# Altium PCB WIZ750SR_V1.0.PcbDoc
Units mm, origin at the board's own origin, x right, y up, seen from the top; angles counter-clockwise.
Board outline 45 x 30 mm, 4 copper layers (Top Layer, Internal Plane 1, Internal Plane 2, Bottom Layer); 94 components, 70 nets, 325 pads, 127 vias.
Unrouted connection lines stored in the file: 1.
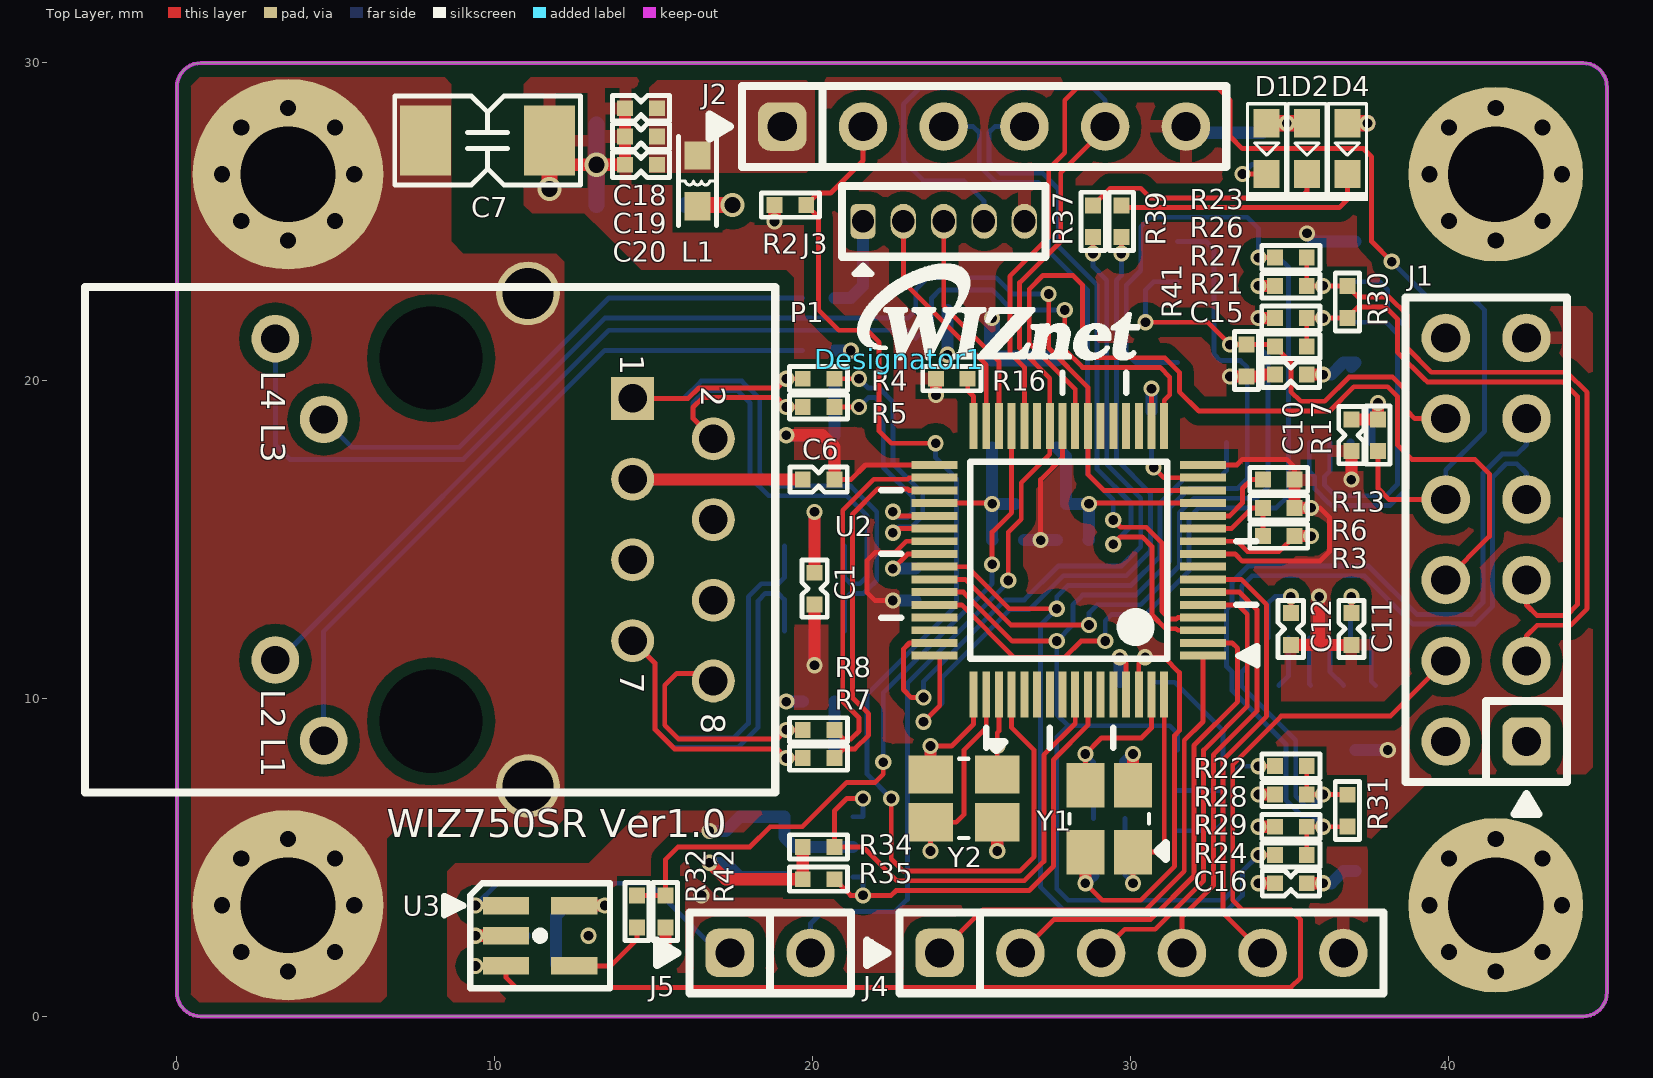
[diagram p0: Top Layer view]
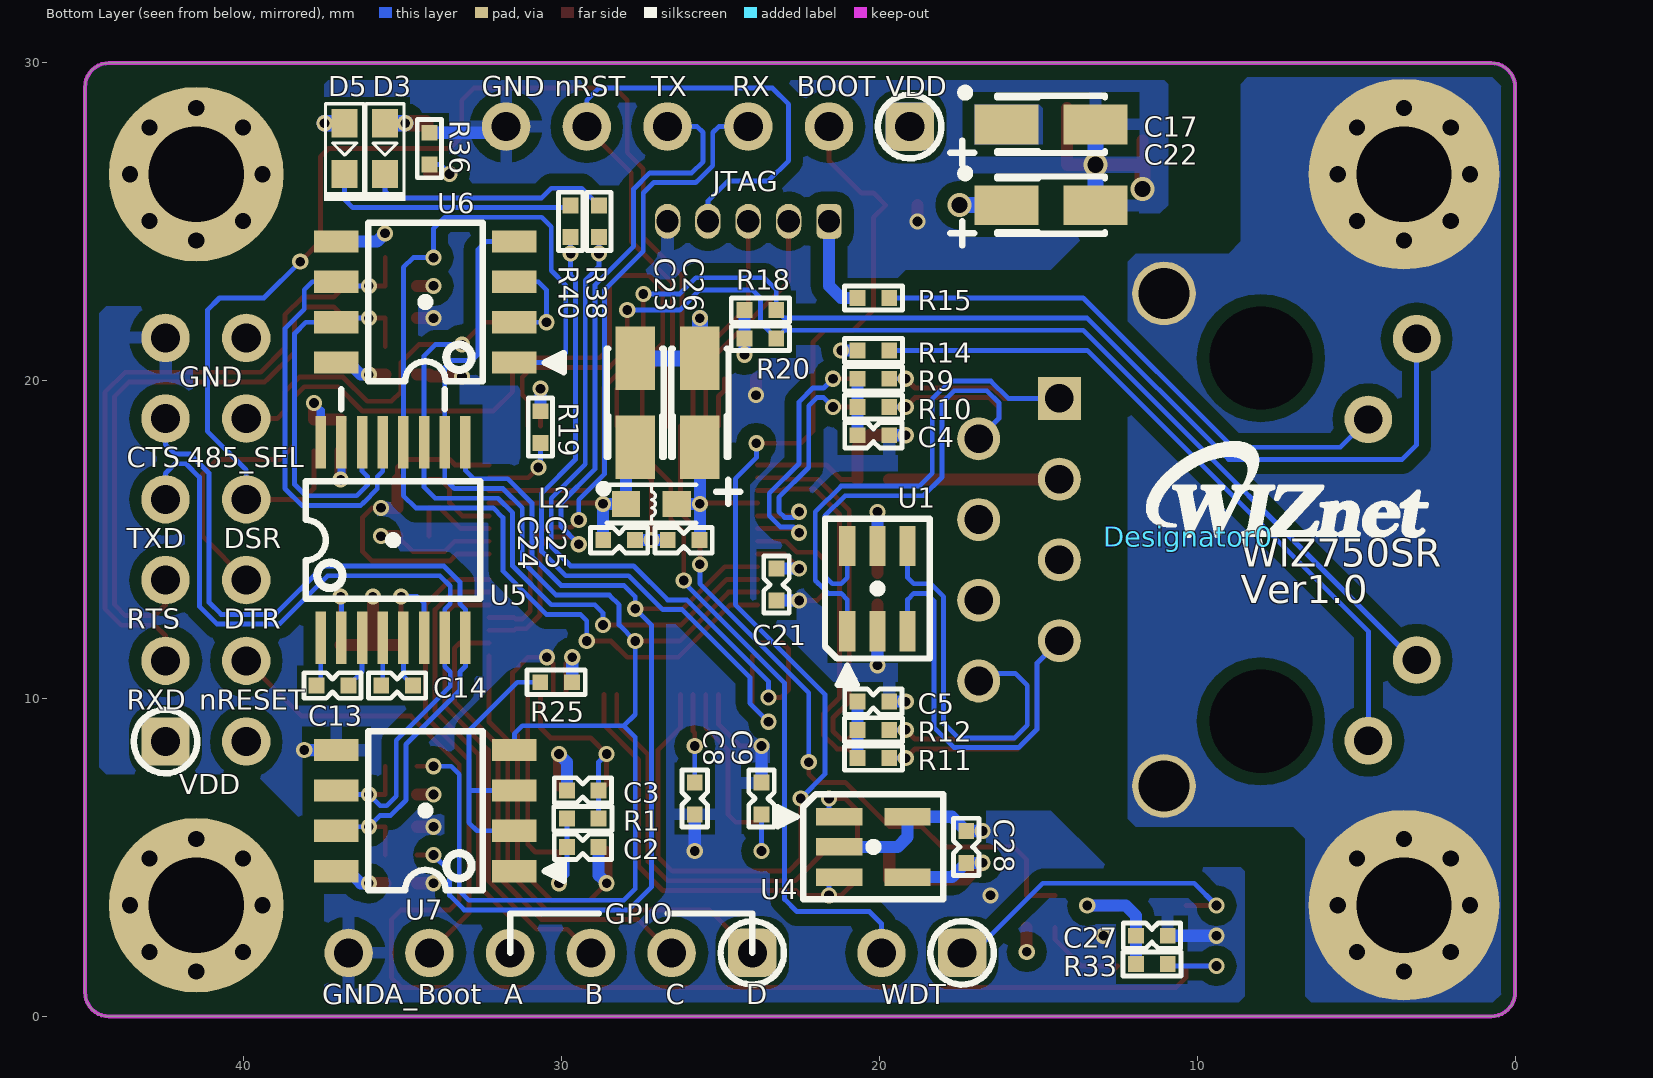
[diagram p1: Bottom Layer view, seen from below]
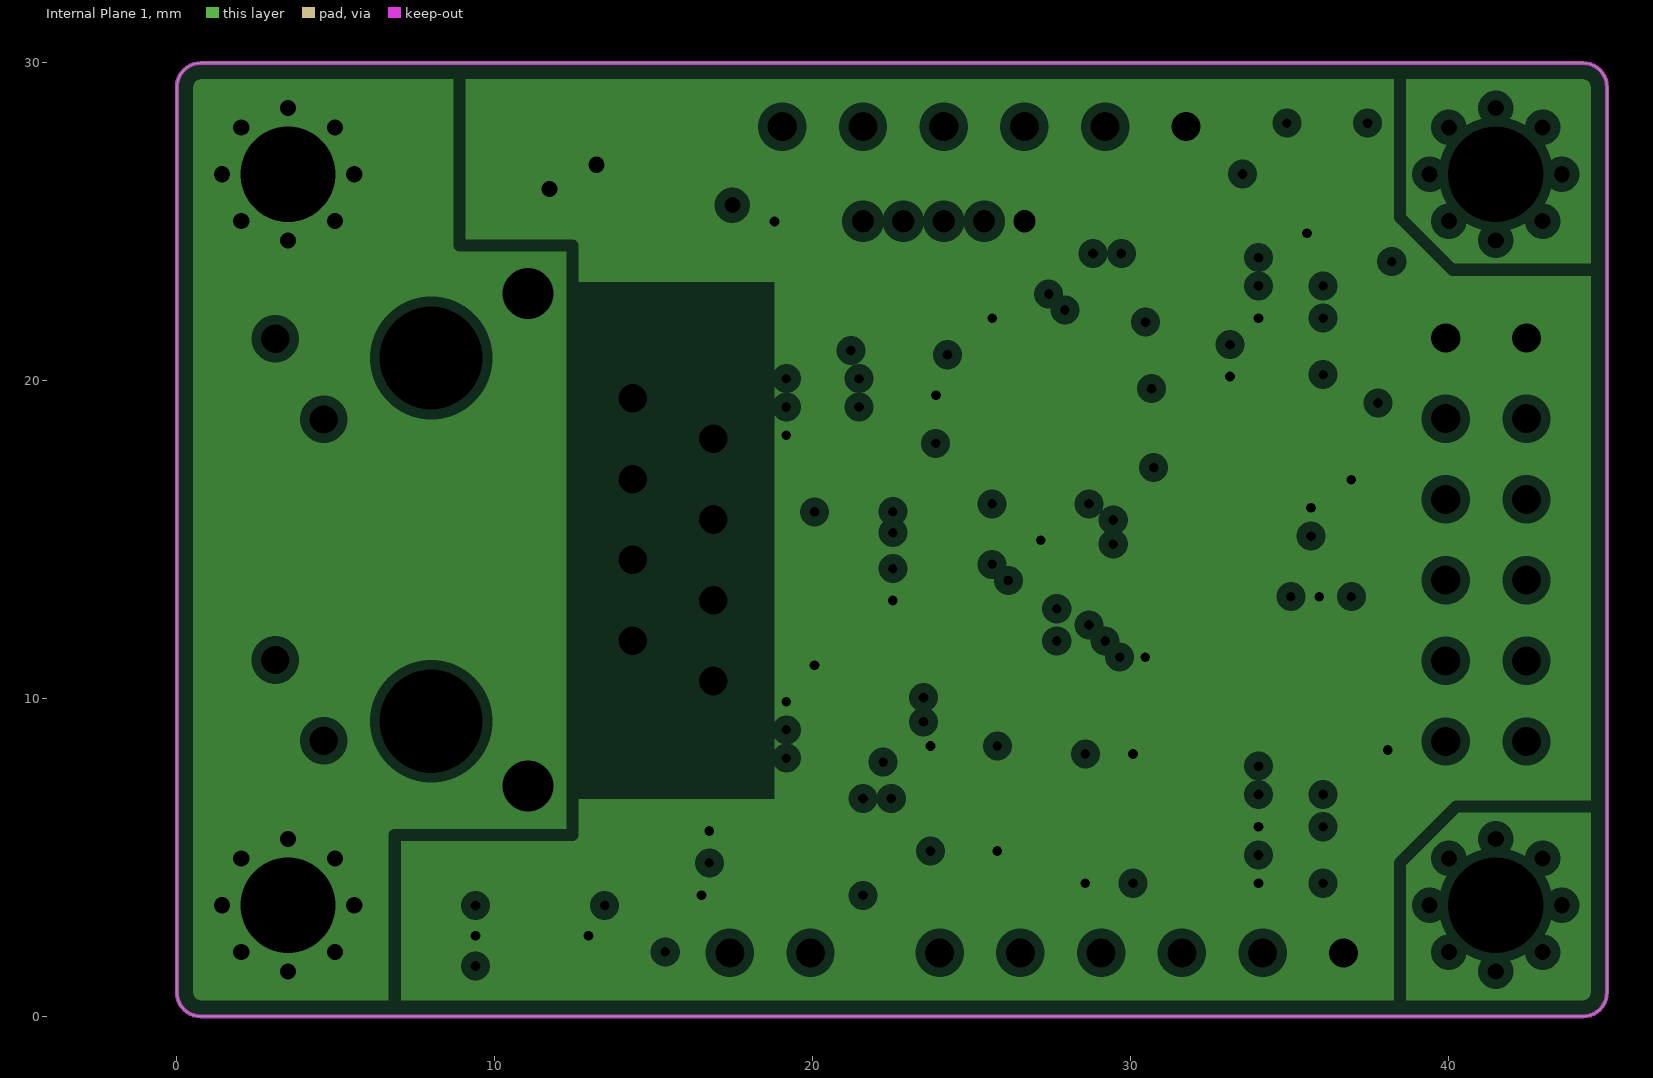
[diagram p2: Internal Plane 1, clearances drawn from the general rule]
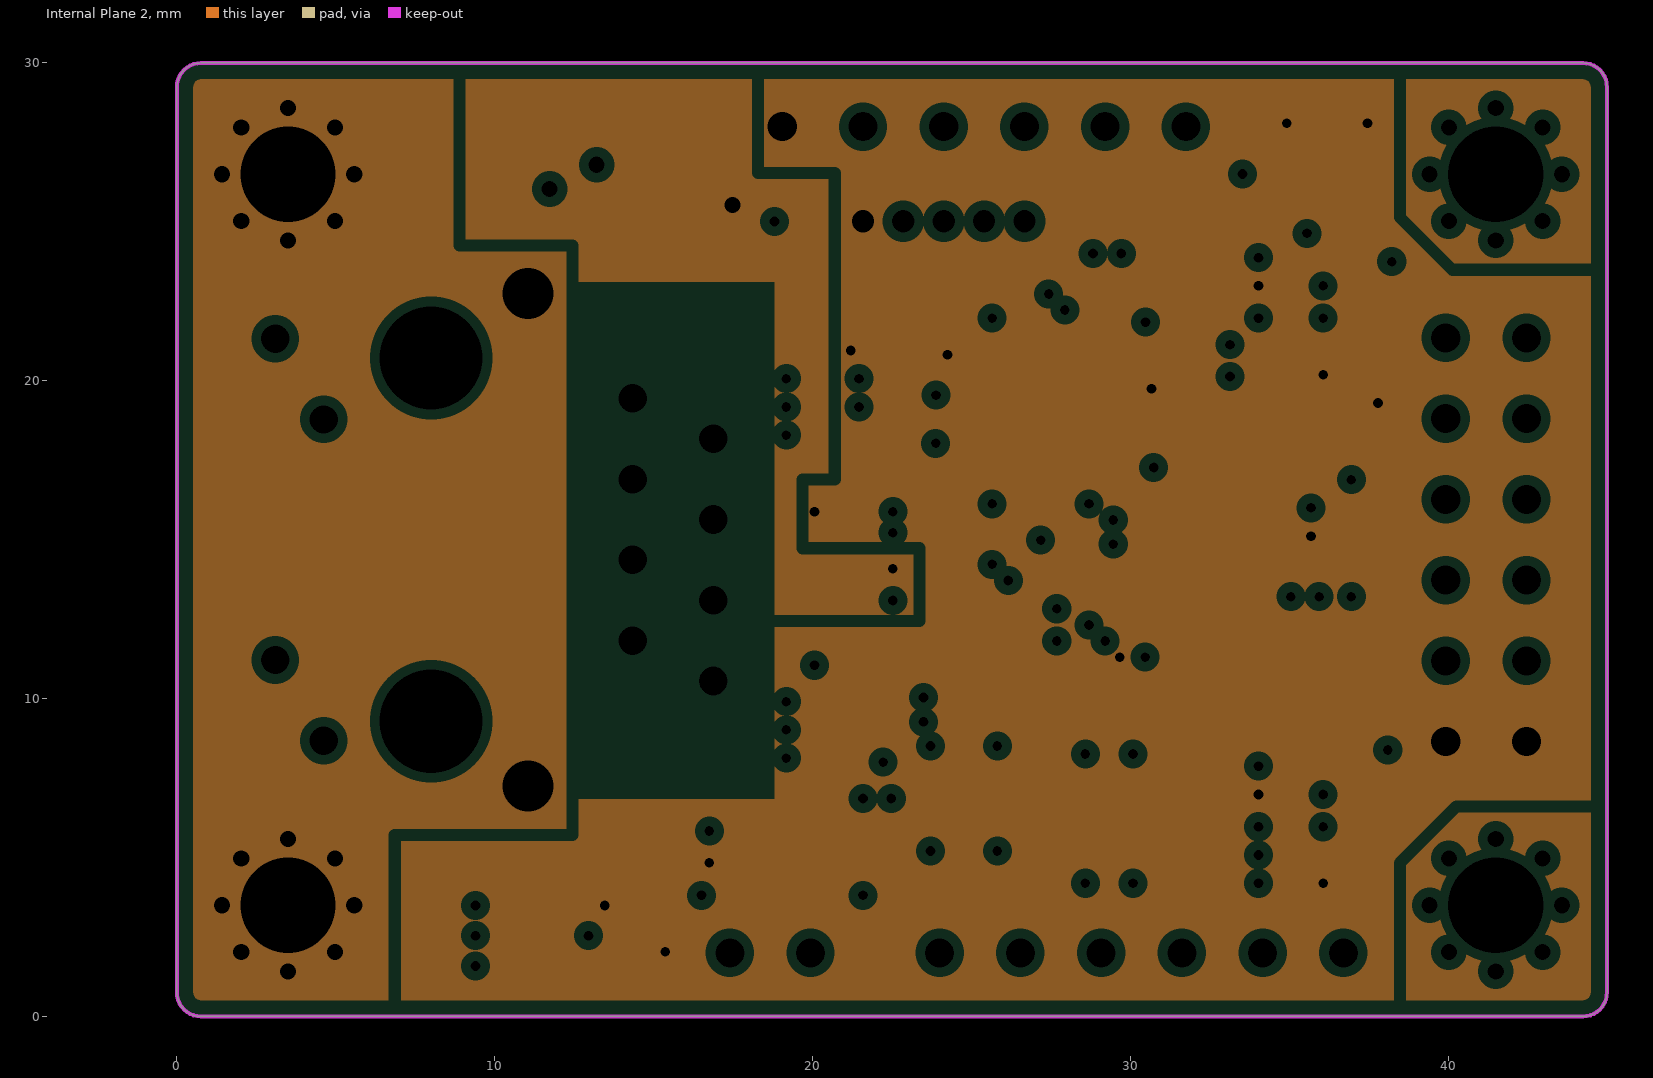
[diagram p3: Internal Plane 2, clearances drawn from the general rule]
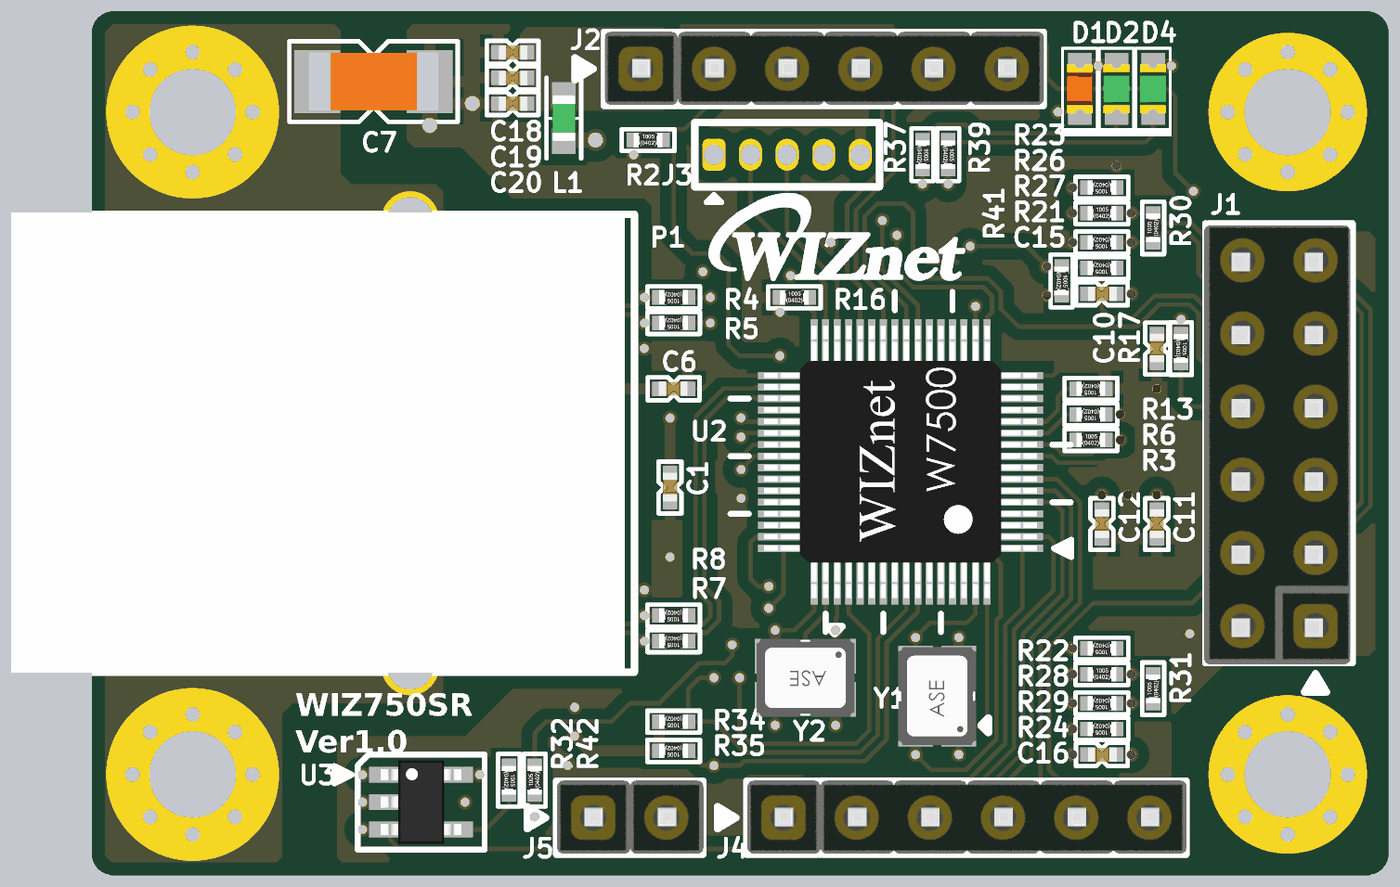
[diagram p4: 3D render of the assembled board from above, using the file's embedded part models]
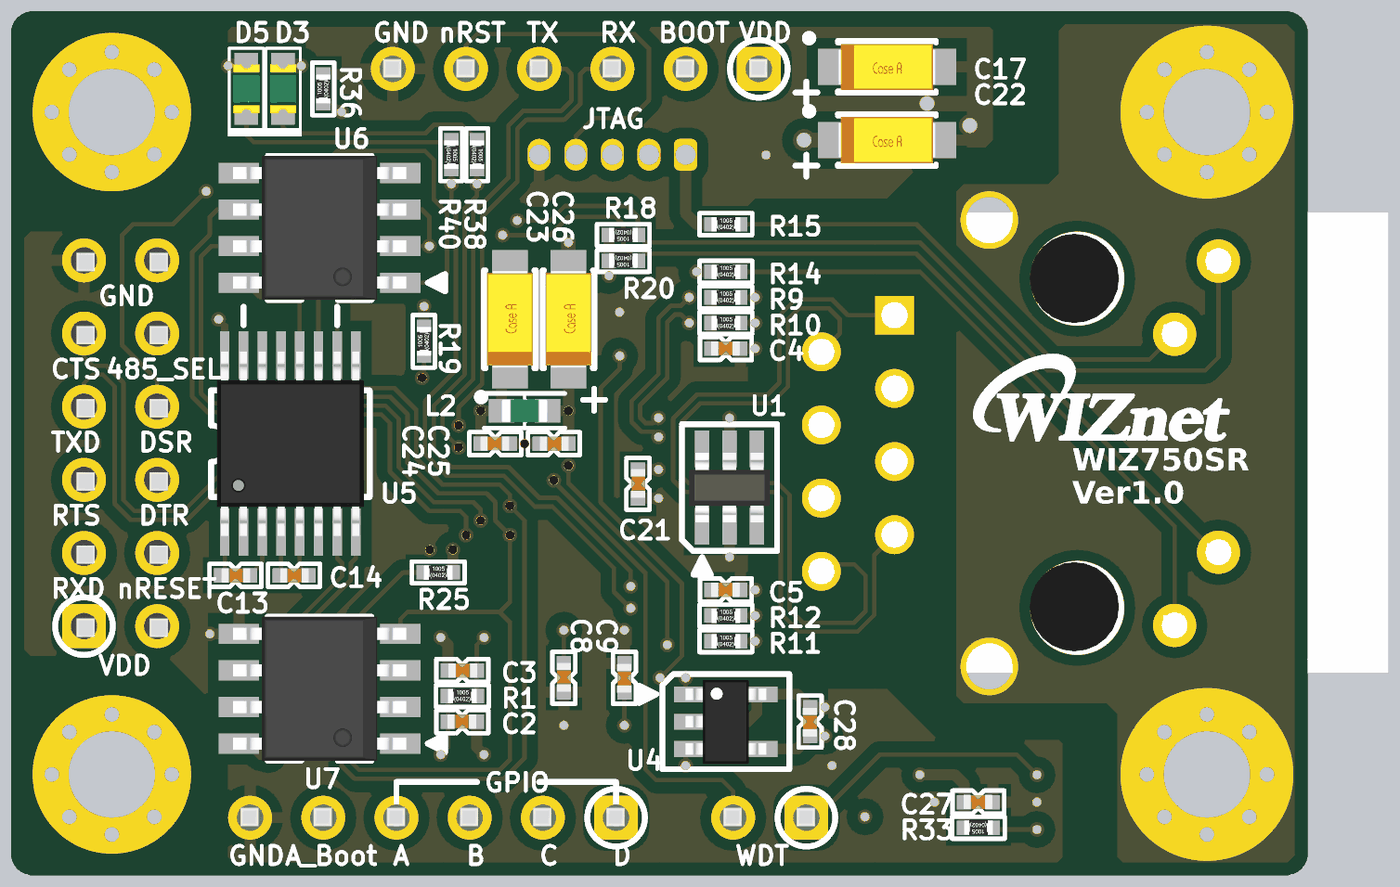
[diagram p5: 3D render of the assembled board from below, using the file's embedded part models]

## Layer stack, top to bottom
Top Solder: solder mask 0.0102, Solder Resist, Dk 3.5
Top Layer: signal copper 0.0356
Dielectric1: core 0.32, FR-4, Dk 4.8
Internal Plane 1: plane copper 0.0356, net CH_GND
Dielectric5: prepreg 0.32, FR-4, Dk 4.8
Internal Plane 2: plane copper 0.0356, net CH_GND
Dielectric6: core 0.32, FR-4, Dk 4.8
Bottom Layer: signal copper 0.0356
Bottom Solder: solder mask 0.0102, Solder Resist, Dk 3.5

## Board outline
0,0.762 0,29.238 cw(c0.762,29.238) 0.762,30 44.238,30 cw(c44.238,29.238) 45,29.238 45,0.762 cw(c44.238,0.762) 44.238,0 0.762,0 cw(c0.762,0.762)

## Design rules (kind name [scope] priority, off if disabled: settings)
Clearance [All] p1: gap=0.15 except(0.381: Poly-Poly Via-Poly Track-Poly SMDPad-Poly Fill-Poly THPad-Poly)
DiffPairsRouting [All] p1: maxlimit=0.254 minlimit=0.127 mostfreqgap=0.152 toplayer_minwidth=0.152 toplayer_maxwidth=0.381 toplayer_prefwidth=0.152 bottomlayer_minwidth=0.152 bottomlayer_maxwidth=0.381 bottomlayer_prefwidth=0.152 maxuncoupledlength=15.24
HoleSize [All] p1: absolutevalues=TRUE maxlimit=4.064 minlimit=0.025 maxpercent=80.000 minpercent=20.000
PlaneClearance [All] p1: clearance=0.305
PlaneConnect [All] p1: planeconnectstyle=Direct reliefexpansion=0.508 reliefentries=4 reliefconductorwidth=0.254 reliefairgap=0.254
PolygonConnect PolygonConnect_2 [IsPad vs IsNamedPolygon('Top Layer-GND') Or  IsNamedPolygon('Bottom Layer-GND')] p1: connectstyle=Relief reliefconductorwidth=0.381 reliefentries=4 polygonreliefangle="90 Angle" airgapwidth=0.381
PolygonConnect PolygonConnect_1 [IsVia] p2: connectstyle=Direct reliefconductorwidth=0.254 reliefentries=4 polygonreliefangle="90 Angle" airgapwidth=0.254
PolygonConnect [All] p3: connectstyle=Direct reliefconductorwidth=0.254 reliefentries=4 polygonreliefangle="90 Angle" airgapwidth=0.254
RoutingVias [All] p1: holewidth=0.305 width=0.508 viastyle="Through Hole" minholewidth=0.305 minwidth=0.508 maxholewidth=0.508 maxwidth=0.762
SolderMaskExpansion [All] p1: expansion=0
UnpouredPolygon [All] p1: allowunpoured=FALSE
Width [All] p1: maxlimit=2.54 minlimit=0.102 preferedwidth=0.152 minimp=50.000000 maximp=50.000000 favimp=50.000000
25 further rules are at their usual default settings.

## Classes and differential pairs
component class 1.WIZ750SR_W7500P: C1 C2 C3 C4 C5 C6 C7 C8 C9 P1 R1 R2 R3 R4 R5 R6 R7 R8 R9 R10 R11 R12 R13 R14 R15 R16 R17 R18 R19 R20 U1 U2 Y1 Y2
component class 2.WIZ750SR_Transceiver: C10 C11 C12 C13 C14 C15 C16 J1 LD1 LD2 R21 R22 R23 R24 R25 R26 R27 R28 R29 R30 R31 R41 U5 U6 U7
differential pair U_DIFF: +U_RXD2 -U_TXD2
differential pair MDI_T: +MDI_T_P -MDI_T_N
differential pair MDI_R: +MDI_R_P -MDI_R_N
differential pair MDI0_T: +MDI0_T_P -MDI0_T_N
differential pair MDI0_R: +MDI0_R_P -MDI0_R_N
differential pair 422_RXD: +422_RXD+ -422_RXD-
differential pair 422_TXD: +422_TXD+ -422_TXD-

## Components (designator, comment, footprint, x,y, rotation, side; value= is the part's Value field where it differs from the comment)
C1 "0.1uF" CAP-0402 20.066,13.462 r90 top
C2 "20pF" CAP-0402 29.337,5.334 r0 bottom
C3 "20pF" CAP-0402 29.337,7.112 r180 bottom
C4 "0.1uF" CAP-0402 20.193,18.288 r0 bottom
C5 "0.1uF" CAP-0402 20.193,9.906 r0 bottom
C6 "0.1uF" CAP-0402 20.193,16.891 r180 top
C7 "1nF/2kV" CAP-1808 9.779,27.559 r180 top
C8 "18pF" CAP-0402 25.815,6.858 r90 bottom
C9 "18pF" CAP-0402 23.715,6.858 r270 bottom
C10 "0.1uF" CAP-0402 36.957,18.288 r90 top
C11 "0.1uF" CAP-0402 36.957,12.192 r90 top
C12 "0.1uF" CAP-0402 35.052,12.192 r90 top
C13 "0.1uF" CAP-0402 37.211,10.414 r180 bottom
C14 "0.1uF" CAP-0402 35.179,10.414 r180 bottom
C15 "0.1uF" CAP-0402 35.052,20.193 r0 top
C16 "0.1uF" CAP-0402 35.052,4.191 r0 top
C17 "10uF/16V" "CAP-A Size" 14.605,28.067 r180 bottom
C18 "0.1uF" CAP-0402 14.605,28.575 r0 top
C19 "0.1uF" CAP-0402 14.605,27.686 r0 top
C20 "0.1uF" CAP-0402 14.605,26.797 r0 top
C21 "0.1uF" CAP-0402 23.241,13.589 r90 bottom
C22 "10uF/16V" "CAP-A Size" 14.605,25.527 r180 bottom
C23 "10uF/16V" "CAP-A Size" 27.686,19.304 r90 bottom
C24 "0.1uF" CAP-0402 28.194,14.986 r0 bottom
C25 "0.1uF" CAP-0402 26.162,14.986 r180 bottom
C26 "10uF/16V" "CAP-A Size" 25.654,19.304 r90 bottom
C27 "0.1uF" CAP-0402 11.43,2.54 r0 bottom
C28 "0.1uF" CAP-0402 17.272,5.334 r270 bottom
D1 "RED-0603" LED-0603-RED 34.29,27.305 r270 top
D2 "GREEN-0603" LED-0603-GREEN 35.56,27.305 r270 top
D3 "GREEN-0603" LED-0603-GREEN 35.56,27.305 r270 bottom
D4 "GREEN-0603" LED-0603-GREEN 36.83,27.305 r270 top
D5 "GREEN-0603" LED-0603-GREEN 36.83,27.305 r270 bottom
Designator0 "Comment" LOGO-WIZNET(SMALL) 10.287,15.113 r180 bottom
Designator1 "Comment" LOGO-WIZNET(SMALL) 22.733,20.701 r0 top locked
J1 "2.54mm 6x2 Pin Header DIP" IDC-2X6 42.466,8.65 r90 top locked
J2 "2.54mm 1x6 Pin Header DIP" IDC-1X6 19.05,28 r0 top locked
J3 "1.27mm_1x5_Pin_header_DIP" IDC-1X5(1.27MM) 21.59,25.019 r0 top
J4 "2.54mm 1x6 Pin Header DIP" IDC-1X6 24.003,2 r0 top
J5 "2.54mm Pin Header" IDC-1X2 17.399,2 r0 top locked
L1 "HH-1M1608-121JT" IND-0603 16.383,26.289 r270 top
L2 "HH-1M1608-121JT" IND-0603 27.178,16.129 r180 bottom
P1 "BS-RB10005" RJ45-125BAG1A 8,15 r270 top locked
R1 "1M" RES-0402#1 29.337,6.223 r180 bottom
R2 "4.7K" RES-0402#1 19.304,25.527 r0 top
R3 "4.7K" RES-0402#1 34.671,15.113 r0 top
R4 "33R" RES-0402#1 20.193,20.066 r180 top
R5 "33R" RES-0402#1 20.193,19.177 r180 top
R6 "4.7K" RES-0402#1 34.671,16.002 r180 top
R7 "33R" RES-0402#1 20.193,8.128 r180 top
R8 "33R" RES-0402#1 20.193,9.017 r180 top
R9 "49.9R/1%" RES-0402#1 20.193,20.066 r180 bottom
R10 "49.9R/1%" RES-0402#1 20.193,19.177 r180 bottom
R11 "49.9R/1%" RES-0402#1 20.193,8.128 r180 bottom
R12 "49.9R/1%" RES-0402#1 20.193,9.017 r180 bottom
R13 "4.7K" RES-0402#1 34.671,16.891 r180 top
R14 "330R" RES-0402#1 20.193,20.955 r180 bottom
R15 "330R" RES-0402#1 20.193,22.606 r180 bottom
R16 "6.19K/1%" RES-0402#1 24.384,20.066 r0 top
R17 "4.7K" RES-0402#1 37.795,18.288 r270 top
R18 "5.1K" RES-0402#1 23.749,22.225 r0 bottom
R19 "5.1K" RES-0402#1 30.67,18.542 r90 bottom
R20 "5.1K" RES-0402#1 23.749,21.336 r0 bottom
R21 "0R" RES-0402#1 35.052,21.082 r180 top
R22 "0R" RES-0402#1 35.052,7.874 r180 top
R23 "0R" RES-0402#1 35.052,23.876 r180 top
R24 "0R" RES-0402#1 35.052,5.08 r180 top
R25 "4.7K" RES-0402#1 30.175,10.516 r180 bottom
R26 "200R" RES-0402#1 35.052,22.987 r0 top
R27 "200R" RES-0402#1 35.052,21.971 r180 top
R28 "200R" RES-0402#1 35.052,6.985 r0 top
R29 "200R" RES-0402#1 35.052,5.969 r180 top
R30 "120R" RES-0402#1 36.83,22.479 r90 top
R31 "120R" RES-0402#1 36.83,6.477 r90 top
R32 "0R" RES-0402#1 14.478,3.302 r270 top
R33 "4.7K" RES-0402#1 11.43,1.651 r0 bottom
R34 "4.7K" RES-0402#1 20.193,5.334 r180 top
R35 "4.7K" RES-0402#1 20.193,4.318 r180 top
R36 "330R" RES-0402#1 34.163,27.305 r90 bottom
R37 "330R" RES-0402#1 28.829,25.019 r270 top
R38 "330R" RES-0402#1 28.829,25.019 r270 bottom
R39 "330R" RES-0402#1 29.718,25.019 r270 top
R40 "330R" RES-0402#1 29.718,25.019 r270 bottom
R41 "NC" RES-0402#1 33.655,20.637 r270 top
R42 "4.7K" RES-0402#2 15.367,3.302 r90 top
U1 "tpd4s009" SOT-23-6L 20.066,13.462 r90 bottom
U2 "W7500P" W7500-LQFP64 28.067,14.351 r180 top locked
U3 "STM6823RWY6F" SOT-23-5L 11.43,2.54 r0 top
U4 "24AA16T-I/OT" SOT-23-5L 20.193,5.334 r180 bottom
U5 "SP3232EBEY" TSSOP16(0.65/6.4) 35.306,14.986 r90 bottom locked
U6 "SP3485EN" SO-08 34.29,22.479 r0 bottom
U7 "SP3485EN" SO-08 34.29,6.477 r0 bottom
Y1 "12MHz" OSC-TZ1067B 29.337,6.223 r90 top
Y2 "25MHz" OSC-82J0626 24.765,6.858 r180 top

## Footprints (in the part's own frame and the unit in brackets; to place one, negate y for a bottom-side part, rotate by r counter-clockwise, add the part's x,y. Pads: shape width x height; smd on the part's side, far side on the other; paste and mask are expansions set on the pad)
CAP-0402 [mm]
  rect 0.5x0.5 smd: 1(-0.5,0) 2(0.5,0)
  silkscreen extent -0.9,-0.4 0.9,0.4, body extent -0.48,-0.25 0.52,0.25, height 0.6
CAP-1808 [mm] "Ceramic CAP 1808(4520)"
  rect 1.6x2.2 smd: 1(-1.95,0) 2(1.95,0)
  silkscreen extent -2.92,-1.4 2.92,1.4, body extent -2.25,-1.02 2.25,1.01, height 2
"CAP-A Size" [mm] "Tantal CAP A Size EIA/IECQ 3216"
  rect 2x1.25 smd: 1(-1.4,0) 2(1.4,0)
  silkscreen extent -3.17,-1.27 1.7,1.12, body extent -1.7,-0.8 1.7,0.8, height 1.75
IDC-1X2 [mil]
  rrect50% 60x60 hole 36: 1(0,0)
  round 60 hole 36: 2(100,0)
  silkscreen extent -90,-50 150,50, body extent -49,-49 151,51, height 336
IDC-1X5(1.27MM) [mm]
  rrect50% 0.8x1.1 hole 0.7: 1(0,0)
  oval 0.8x1.1 hole 0.7: 2(1.27,0) 3(2.54,0) 4(3.81,0) 5(5.08,0)
  silkscreen extent -0.66,-1.65 5.74,1.11
IDC-1X6 [mil] "6-Way 2.54 mm Male Header"
  rrect50% 60x60 hole 36: 1(0,0)
  round 60 hole 36: 2(100,0) 3(200,0) 4(300,0) 5(400,0) 6(500,0)
  silkscreen extent -90,-50 550,50, body extent -49,-49 551,51, height 336
IDC-2X6 [mil]
  rrect50% 60x60 hole 36: 1(0,0)
  round 60 hole 36: 2(0,100) 3(100,0) 4(100,100) 5(200,0) 6(200,100) 7(300,0) 8(300,100) 9(400,0) 10(400,100) 11(500,0) 12(500,100)
  silkscreen extent -90,-50 550,150, body extent -52,-48 548,152, height 336
IND-0603 [mm] "Inductor 0603(1608)"
  rect 0.89x0.82 smd: 1(-0.8,0) 2(0.8,0)
  silkscreen extent -1.4,-0.6 1.4,0.6, body extent -0.8,-0.4 0.8,0.4, height 0.95
LED-0603-GREEN [mm] "LED-0603-GREEN"
  rect 0.89x0.82 smd: 1(-0.8,0) 2(0.8,0)
  silkscreen extent -1.41,-0.65 1.65,0.65, body extent -0.85,-0.45 0.85,0.45, height 0.9
LED-0603-RED [mm] "LED-0603-RED"
  rect 0.89x0.82 smd: 1(-0.8,0) 2(0.8,0)
  silkscreen extent -1.41,-0.65 1.65,0.65, body extent -0.85,-0.45 0.85,0.45, height 0.9
LOGO-WIZNET(SMALL) [mm]
  silkscreen extent -1.27,0 7.52,2.93
OSC-82J0626 [mm]
  rect 1.4x1.2 smd: 1(-1.05,-0.75) 2(1.05,-0.75) 3(1.05,0.75) 4(-1.05,0.75)
  silkscreen extent -1.27,-1.78 0.15,1.25, body extent -1.7,-1.35 1.7,1.35, height 1.06
OSC-TZ1067B [mm]
  rect 1.4x1.2 smd: 1(-1.05,-0.75) 2(1.05,-0.75) 3(1.05,0.75) 4(-1.05,0.75)
  silkscreen extent -1.27,-1.78 0.15,1.25, body extent -1.7,-1.35 1.7,1.35, height 1.06
RES-0402#1 [mm]
  rect 0.5x0.5 smd: 1(-0.5,0) 2(0.5,0)
  silkscreen extent -0.91,-0.38 0.91,0.38, body extent -0.5,-0.25 0.5,0.25, height 0.35
RES-0402#2 [mm]
  rect 0.5x0.5 smd: 1(-0.5,-0.004) 2(0.5,-0.004)
  silkscreen extent -0.91,-0.38 0.91,0.38, body extent -0.5,-0.25 0.5,0.25, height 0.35
RJ45-125BAG1A [mm]
  round 1.5 hole 0.89: L1(6.325,-3.38) L2(3.785,-4.9) L3(-3.785,-3.38) L4(-6.325,-4.9)
  rect 1.35x1.35 hole 0.9: R1(-4.445,6.34)
  round 1.35 hole 0.9: R2(-3.175,8.88) R3(-1.905,6.34) R4(-0.635,8.88) R5(0.635,6.34) R6(1.905,8.88) R7(3.175,6.34) R8(4.445,8.88)
  round 2 hole 1.6: R9(-7.75,3.05) R10(7.75,3.05)
  round 1.8 hole 3.25: ""(-5.715,0) ""(5.715,0)
  silkscreen extent -7.95,-10.89 7.95,10.83, body extent -8.03,-10.8 7.97,10.5, height 13.1
SO-08 [mm]
  rect 1.4x0.7 smd: 1(-2.8,1.905) 2(-2.8,0.635) 3(-2.8,-0.635) 4(-2.8,-1.905) 5(2.8,-1.905) 6(2.8,-0.635) 7(2.8,0.635) 8(2.8,1.905)
  silkscreen extent -4.35,-2.5 1.8,2.5, body extent -3.01,-2.5 3.01,2.5, height 1.75
SOT-23-5L [mm]
  rect 1.45x0.55 smd: 1(-1.075,0.95) 2(-1.075,0) 3(-1.075,-0.95) 4(1.075,-0.95) 5(1.075,0.95)
  silkscreen extent -3.01,-1.65 2.2,1.65, body extent -1.4,-1.45 1.4,1.45, height 1.45
SOT-23-6L [mm]
  rect 1.27x0.508 smd: 1(-1.34,0.95) 2(-1.34,0) 3(-1.34,-0.95) 4(1.34,-0.95) 5(1.34,0) 6(1.34,0.95)
  silkscreen extent -3.02,-1.65 2.2,1.65, body extent -1.21,-1.4 1.21,1.4, height 1.09
TSSOP16(0.65/6.4) [mil]
  rect 65x13 smd: 1(-121.04,89.57) 2(-121.04,63.98) 3(-121.04,38.39) 4(-121.04,12.8) 5(-121.04,-12.8) 6(-121.04,-38.39) 7(-121.04,-63.98) 8(-121.04,-89.57) 9(121.04,-89.57) 10(121.04,-63.98) 11(121.04,-38.39) 12(121.04,-12.8) 13(121.04,12.8) 14(121.04,38.39) 15(121.04,63.98) 16(121.04,89.57)
  silkscreen extent -73,-108 187,108, body extent -126,-100 126,100, height 47
W7500-LQFP64 [mm] "WIZnet ARM Cortex-M0, LQFP64, Pitch 0.40mm"
  rect 1.45x0.25 smd: 1(-4.225,3) 2(-4.225,2.6) 3(-4.225,2.2) 4(-4.225,1.8) 5(-4.225,1.4) 6(-4.225,1) 7(-4.225,0.6) 8(-4.225,0.2) 9(-4.225,-0.2) 10(-4.225,-0.6) 11(-4.225,-1) 12(-4.225,-1.4) 13(-4.225,-1.8) 14(-4.225,-2.2) 15(-4.225,-2.6) 16(-4.225,-3) 33(4.225,-3) 34(4.225,-2.6) 35(4.225,-2.2) 36(4.225,-1.8) 37(4.225,-1.4) 38(4.225,-1) 39(4.225,-0.6) 40(4.225,-0.2) 41(4.225,0.2) 42(4.225,0.6) 43(4.225,1) 44(4.225,1.4) 45(4.225,1.8) 46(4.225,2.2) 47(4.225,2.6) 48(4.225,3)
  rect 0.25x1.45 smd: 17(-3,-4.225) 18(-2.6,-4.225) 19(-2.2,-4.225) 20(-1.8,-4.225) 21(-1.4,-4.225) 22(-1,-4.225) 23(-0.6,-4.225) 24(-0.2,-4.225) 25(0.2,-4.225) 26(0.6,-4.225) 27(1,-4.225) 28(1.4,-4.225) 29(1.8,-4.225) 30(2.2,-4.225) 31(2.6,-4.225) 32(3,-4.225) 49(3,4.225) 50(2.6,4.225) 51(2.2,4.225) 52(1.8,4.225) 53(1.4,4.225) 54(1,4.225) 55(0.6,4.225) 56(0.2,4.225) 57(-0.2,4.225) 58(-0.6,4.225) 59(-1,4.225) 60(-1.4,4.225) 61(-1.8,4.225) 62(-2.2,4.225) 63(-2.6,4.225) 64(-3,4.225)
  silkscreen extent -5.92,-5.9 5.9,5.9, body extent -4.73,-4.74 4.73,4.72, height 1

## Part data
C1 C2 C3 C4 C5 C6 C8 C9 C10 C11 C12 C13 C14 C15 C16 C18 C19 C20 C21 C24 C25 C27 C28: library part CAP-0402, "Ceramic CAP 0402(1005)"
C7: library part CAP-1808, "Ceramic CAP 1808(4520)"
C17 C22 C23 C26: library part "CAP-A Size", "Tantla CAP A Size EIA/IECQ 3216"
D1 D2 D3 D4 D5: library part LED-0603, "LED-0603"
J1: library part "Header 6X2", "Header, 6-Pin, Dual row"
J2 J4: library part "Header 6", "Header, 6-Pin"
J5: library part "Header 2", "Header, 2-Pin"
L1 L2: library part IND-0603, "Inductor 0603(1608)"
P1: library part RB1-125BAG1A, "10/100 BASE-TX MAGJACK"
R1 R2 R3 R4 R5 R6 R7 R8 R9 R10 R11 R12 R13 R14 R15 R16 R17 R18 R19 R20 R21 R22 R23 R24 R25 R26 R27 R28 R29 R30 R31 R32 R33 R34 R35 R36 R37 R38 R39 R40 R41 R42: library part RES-0402, "RES-0402"
U1: "6-PIN SOT DBVor DCK Package"
U2: "WIZnet ARM Cortex-M0, Add PHY"
U3: library part STM6823, "Manual_Reset SOT23-5"
U4: library part 24AAxxT-i-OT, "SOT-23"
U5: "True +3.0V to +5.5V RS-232 Transceivers TSSOP16"
U6 U7: "SP3485EN SOIC8"
Y1: library part OSC-TZ1067B-12MHz, "X-tal 12MHz,3.2x2.5 SMD, CL=20pF"
Y2: library part OSC-82J0626-25MHz, "X-tal 25MHz,3.2x2.5 SMD, CL=18pF"

## Free pads (board coordinates)
  round 6 hole 3: ""(3.5,3.5) ""(3.5,26.5)
  round 5.5 hole 3: ""(41.5,3.5) ""(41.5,26.5)

## Via types
v1: diameter 0.508, hole 0.305, Top Layer to Bottom Layer, tented both sides, 92 vias
v2: diameter 0.762, hole 0.508, Top Layer to Bottom Layer, tented both sides, 35 vias

## Nets (pads, with @x,y where several pads share a name; then routed paths per layer and width w, separated by ;. In a path a pad name is that pad's centre, name@x,y a point inside that pad or via, vN(x,y) a via of type N, cw(c..) or ccw(c..) an arc to the next point about the centre after c; other vN are vias at no path point)
100M_LED: P1.L2 R20.1 U2.17 | length 37.1
  Top Layer w0.152: v1(27.94,22.225) 27.94,20.98 28.499,20.422 30.937,20.422 31.242,20.117 31.242,19.558 31.067,19.383 U2.17
  Bottom Layer w0.152: P1.L2 3.214,11.215 13.589,21.59 22.995,21.59 R20.1 23.749,21.836 23.749,22.606 24.003,22.86 25.654,22.86 26.289,22.225 v1(27.94,22.225)
422_RXD+: J1.3 R23.1 R26.2 R30.2 U5.13 U6.6 | length 34.9
  Top Layer w0.152: R23.1 R26.2 v1(36.068,22.987) R30.2@36.822,22.987 ; R30.2 37.178,22.631 38.15,22.631 38.71,22.072 38.71,21.031 39.472,20.269 43.738,20.269 44.374,19.633 44.374,12.828 44.285,12.738 43.854,12.308 42.799,12.308 42.466,11.975 J1.3
  Bottom Layer w0.152: U5.13 35.631,17.159 35.804,16.986 35.804,16.597 36.233,16.167 36.323,16.078 38.176,16.078 38.71,16.612 38.71,21.641 38.1,22.25 38.1,22.86 37.846,23.114 U6.6 ; v1(36.068,22.987) U6.6@36.963,22.987
422_RXD-: J1.5 R21.1 R27.1 R30.1 U5.14 U6.7 | length 31.7
  Top Layer w0.152: R21.1 R27.1 v1(36.068,21.971) 36.822,21.971 R30.1 37.178,22.327 38.024,22.327 38.405,21.946 38.405,20.905 39.256,20.054 39.345,19.964 43.612,19.964 44.069,19.507 44.069,12.954 43.727,12.612 42.799,12.612 42.466,12.945 J1.5
  Bottom Layer w0.152: v1(36.068,21.971) U6.7@36.963,21.971 ; U5.14 36.281,17.159 36.108,16.986 36.108,16.724 36.449,16.383 38.05,16.383 38.405,16.738 38.405,21.488 38.049,21.844 U6.7
422_TXD+: J1.7 R22.1 R28.2 R31.2 U5.7 U7.6 | length 26.8
  Top Layer w0.152: R22.1 R28.2 v1(36.068,6.985) R31.2@36.822,6.985
  Bottom Layer w0.152: U7.6@36.963,6.985 v1(36.068,6.985) 35.712,6.629 35.509,6.629 35.204,6.934 35.204,8.687 33.508,10.383 33.508,10.837 33.681,11.01 U5.7 33.681,12.813 33.508,12.986 33.508,13.544 33.833,13.868 37.364,13.868 38.888,12.344 40.843,12.344 41.402,12.903 41.402,16.968 41.822,17.388 42.164,17.388 42.466,17.086 J1.7
422_TXD-: J1.9 R24.1 R29.1 R31.1 U5.8 U7.7 | length 27.8
  Top Layer w0.152: R24.1 R29.1 v1(36.068,5.969) R31.1@36.822,5.969
  Bottom Layer w0.152: U7.7@36.963,5.969 v1(36.068,5.969) 35.712,6.325 35.383,6.325 34.9,6.808 34.9,8.561 33.204,10.257 33.204,10.837 33.031,11.01 U5.8 33.031,12.813 33.204,12.986 33.204,13.67 33.707,14.173 37.49,14.173 39.014,12.649 40.717,12.649 41.097,13.029 41.097,17.094 41.695,17.692 42.164,17.692 42.466,17.994 J1.9
485_DIR: J1.10 R21.2 R41.1 U2.42 U5.11 U6.2 U6.3 | length 34.9
  Top Layer w0.152: U2.42 24.806,13.751 26.238,12.319 v1(28.702,12.319) ; v1(30.48,21.844) 32.432,21.844 v1(33.139,21.137) R41.1 34.497,21.137 R21.2 35.052,20.582 35.052,19.66 35.357,19.355 36.119,19.355 36.881,20.117 38.252,20.117 38.71,19.66 38.71,19.05 38.95,18.81 J1.10
  Bottom Layer w0.152: v1(28.702,12.319) 28.702,12.7 28.956,12.954 30.328,12.954 31.547,14.173 31.547,15.85 32.004,16.307 33.985,16.307 34.331,16.653 U5.11 34.331,20.787 33.981,21.137 v1(33.139,21.137) ; U6.2 v1(30.48,21.844) 30.48,22.86 30.734,23.114 U6.3
APP_BOOT: J4.5 U2.7 | length 14.4
  Top Layer w0.152: U2.7 33.493,13.751 34.29,12.954 34.29,9.449 32.918,8.077 32.918,3.245 J4.5
BOOT: J2.2 R2.2 U2.52 | length 39
  Top Layer w0.152: J2.2 21.59,26.924 20.574,25.908 20.185,25.908 R2.2 20.193,25.138 20.193,22.225 20.828,21.59 21.717,21.59 22.098,21.209 22.098,18.415 22.479,18.034 v1(23.876,18.034) ; v1(22.479,6.858) 22.479,4.953 22.86,4.572 26.518,4.572 26.975,5.029 26.975,8.382 26.267,9.09 U2.52
  Bottom Layer w0.152: v1(22.479,6.858) 21.717,7.62 21.717,10.135 24.536,12.954 24.536,16.916 23.876,17.577 v1(23.876,18.034)
CH_GND: C7.2 P1.R9 P1.R10 pad.@3.5,3.5 pad.@3.5,26.5
  other v2: 3.5,1.417 2.027,2.027 4.973,2.027 1.417,3.5 5.583,3.5 2.027,4.973 4.973,4.973 3.5,5.583 3.5,24.417 2.027,25.027 4.973,25.027 1.417,26.5 5.583,26.5 2.027,27.973 4.973,27.973 3.5,28.583
DSR: J1.8 R17.2 U2.28 | length 39.6
  Top Layer w0.152: U2.28 26.667,20.425 26.213,20.879 26.213,23.292 27.432,24.511 27.432,26.67 27.94,27.178 27.94,28.829 28.321,29.21 32.766,29.21 33.147,28.829 33.147,27.686 33.528,27.305 37.338,27.305 37.592,27.051 37.592,24.384 v1(38.227,23.749) ; R17.2 37.795,16.612 38.137,16.27 J1.8
  Bottom Layer w0.152: v1(38.227,23.749) 39.37,22.606 40.767,22.606 41.148,22.225 41.148,18.415 39.926,17.193 J1.8
DTR: J1.6 U2.24 | length 29.1
  Top Layer w0.152: U2.24 28.267,19.739 26.822,21.184 26.822,22.885 27.254,23.317 28.194,23.317 28.499,23.012 28.499,21.031 28.804,20.726 31.09,20.726 31.547,20.269 31.547,19.66 32.156,19.05 36.271,19.05 37.033,19.812 38.1,19.812 38.405,19.507 38.405,17.983 38.862,17.526 40.843,17.526 41.3,17.069 41.3,15.104 J1.6
EXPANSION_GPIO_A: J4.4 U2.6 | length 13.7
  Top Layer w0.152: J4.4 31.623,3.124 32.614,4.115 32.614,8.23 33.985,9.601 33.985,12.802 33.436,13.351 U2.6
EXPANSION_GPIO_B: J4.3 U2.5 | length 14.6
  Top Layer w0.152: J4.3 29.826,2.743 30.785,2.743 32.309,4.267 32.309,8.382 33.68,9.754 33.68,12.649 33.379,12.951 U2.5
EXPANSION_GPIO_C: J4.2 U2.2 | length 15.3
  Top Layer w0.152: J4.2 27.591,3.048 30.632,3.048 32.004,4.42 32.004,8.534 33.376,9.906 33.376,11.582 33.207,11.751 U2.2
EXPANSION_GPIO_D: J4.1 U2.1 | length 15.8
  Top Layer w0.152: J4.1 25.356,3.353 30.48,3.353 31.699,4.572 31.699,8.687 32.292,9.28 U2.1
GND: C1.1 C2.1 C3.1 C4.1 C5.1 C6.1 C7.1 C8.1 C9.1 C10.1 C11.1 C12.1 C15.1 C16.1 C17.2 C18.1 C19.1 C20.1 C21.1 C22.2 C23.2 C24.1 C25.1 C26.2 C27.1 C28.1 J1.11 J1.12 J2.6 J3.5 J4.6 R2.1 R6.1 R13.1 R16.1 R27.2 R29.2 R36.2 R41.2 U1.2 U2.9 U2.16 U2.25 U2.33 U2.39 U2.49 U2.62 U3.2 U4.2 U4.5 U5.15 U6.5 U7.5 Y1.2 Y1.4 Y2.2 Y2.4 | length 88.1
  Top Layer w0.152: C6.1 21.209,16.891 21.669,17.351 U2.33 ; v1(22.53,13.089) 21.963,13.089 21.717,13.335 21.717,14.351 21.971,14.605 22.606,14.605 22.952,14.951 U2.39 ; v1(23.715,8.509) 24.384,8.509 25.067,9.192 U2.49 ; v1(27.178,14.986) 27.178,16.891 27.867,17.58 U2.25 ; v1(28.587,4.191) 29.12,3.658 30.328,3.658 31.394,4.724 31.394,8.839 31.547,8.992 31.547,10.82 31.064,11.303 v1(30.467,11.303) 30.267,11.103 U2.62 ; U2.9 33.303,14.551 33.528,14.326 35.966,14.326 36.271,14.63 36.271,15.697 35.966,16.002 v1(35.687,16.002) ; U2.16 33.353,17.351 33.528,17.526 34.925,17.526 35.171,17.28 R13.1
  Top Layer w0.381: v1(9.398,2.54) U3.2 ; C7.1 11.729,26.797 v2(13.208,26.797) C20.1 C19.1 C18.1 ; v1(18.804,25.011) R2.1 ; v1(19.177,18.288) 20.32,18.288 20.693,17.915 C6.1 ; v1(20.066,11.049) C1.1 ; Y2.2 v1(23.715,8.509) ; v1(23.884,19.55) R16.1 ; v1(25.815,5.207) Y2.4 ; v1(28.587,4.191) Y1.4 ; Y1.2 v1(30.087,8.255) ; v1(33.139,20.138) R41.2 34.108,20.138 34.163,20.193 C15.1 ; v1(34.036,4.191) C16.1 ; v1(34.036,5.969) R29.2 ; v1(34.036,21.971) R27.2 ; C12.1 35.941,11.692 ; R13.1 R6.1 v1(35.687,16.002) ; v1(35.941,13.208) 35.941,11.692 ; C11.1 35.941,11.692 ; v1(36.957,16.891) C10.1
  Top Layer w0.508: v2(11.729,26.035) C7.1@11.729,26.797
  Bottom Layer w0.254: U5.15 36.931,16.917 v1(36.957,16.891)
  Bottom Layer w0.381: v1(9.398,2.54) C27.1 ; v1(16.756,5.834) C28.1 17.722,6.284 U4.5 19.118,5.647 19.431,5.334 U4.2 ; v1(19.177,9.906) C5.1 ; v1(19.177,18.288) C4.1 ; v1(20.066,11.049) U1.2 ; v1(22.53,13.089) C21.1 ; C9.1 v1(23.715,8.509) ; v1(25.815,5.207) C8.1 ; C25.1 v1(27.178,14.986) C24.1 ; v1(28.587,4.191) 28.837,4.441 C2.1 ; C3.1 29.837,8.005 v1(30.087,8.255) ; J2.6 31.945,27.805 R36.2 ; v1(35.56,24.638) 35.814,24.384 U6.5 ; U7.5 v1(38.1,8.382)
  Bottom Layer w0.508: C22.2@13.208,25.53 v2(13.208,26.797) C17.2@13.208,28.064 ; C26.2 v1(25.654,21.971) ; C26.2@25.781,20.701 C23.2@27.686,20.701
  other v1: 12.954,2.54 16.51,3.81
LED_0: P1.L4 R18.1 U2.14 U2.23 | length 40.8
  Top Layer w0.152: v1(27.432,22.733) 27.432,21.031 28.667,19.796 U2.23 28.667,17.053 29.169,16.551 U2.14
  Bottom Layer w0.152: P1.L4 3.1,17.982 3.556,17.526 9.017,17.526 13.462,21.971 22.995,21.971 R18.1 23.249,22.868 23.622,23.241 25.781,23.241 26.289,22.733 v1(27.432,22.733)
LED_1: R19.1 U2.15 | length 2.5
  Top Layer w0.152: v1(30.734,17.272) 31.055,16.951 U2.15
  Bottom Layer w0.152: R19.1 30.67,17.335 v1(30.734,17.272)
MDI0_R_N: R8.1 U2.34 | length 11.5
  Top Layer w0.152: R8.1 20.985,8.725 21.209,8.725 21.463,8.979 21.463,9.398 20.955,9.906 20.955,15.925 21.933,16.903 22.993,16.903 23.041,16.951 U2.34
MDI0_R_P: R7.1 U2.35 | length 11.5
  Top Layer w0.152: R7.1 20.985,8.42 21.335,8.42 21.768,8.853 21.768,9.524 21.26,10.032 21.26,15.799 22.06,16.599 22.993,16.599 23.041,16.551 U2.35
MDI0_T_N: R5.1 U2.37 | length 7.6
  Top Layer w0.152: R5.1 v1(21.463,19.177) ; v1(22.53,15.881) 22.66,15.751 U2.37
  Bottom Layer w0.152: v1(21.463,19.177) 21.755,19.469 21.971,19.469 22.225,19.215 22.225,17.272 23.165,16.332 23.165,15.881 22.987,15.703 22.708,15.703 v1(22.53,15.881)
MDI0_T_P: R4.1 U2.38 | length 8.6
  Top Layer w0.152: R4.1 v1(21.463,20.066) ; v1(22.53,15.221) 22.66,15.351 U2.38
  Bottom Layer w0.152: v1(21.463,20.066) 21.755,19.774 22.097,19.774 22.53,19.341 22.53,17.398 23.47,16.458 23.47,15.755 23.113,15.399 22.708,15.399 v1(22.53,15.221)
MDI_R_N: P1.R8 R8.2 R12.2 U1.4 | length 22.4
  Top Layer w0.152: P1.R8 16.64,10.795 15.732,10.795 15.351,10.414 15.351,9.16 15.786,8.725 18.885,8.725 v1(19.177,9.017) R8.2
  Bottom Layer w0.152: U1.4 19.116,13.807 18.923,13.614 18.39,13.614 18.072,13.297 17.983,13.207 17.983,9.22 17.526,8.763 15.748,8.763 15.351,9.16 15.351,10.414 ; v1(19.177,9.017) R12.2 ; 15.351,10.414 15.732,10.795 ; 15.351,10.414 15.732,10.795 ; 15.732,10.795 P1.R8@16.64,10.795 ; 15.732,10.795 P1.R8@16.64,10.795 ; P1.R8@16.64,10.795 P1.R8 P1.R8@16.64,10.795
MDI_R_P: P1.R7 R7.2 R11.2 U1.3 | length 22.4
  Top Layer w0.152: P1.R7 15.046,11.119 15.046,9.034 15.66,8.42 18.885,8.42 v1(19.177,8.128) R7.2
  Bottom Layer w0.152: U1.3 19.116,13.117 18.923,13.31 18.517,13.31 18.288,13.081 18.288,9.094 17.652,8.458 15.622,8.458 15.532,8.547 15.046,9.034 15.046,11.119 ; v1(19.177,8.128) R11.2 ; 15.046,11.119 P1.R7 15.046,11.119
MDI_T_N: P1.R2 R5.2 R10.2 U1.6 | length 19.3
  Top Layer w0.152: P1.R2 16.24,18.815 16.24,19.161 16.548,19.469 18.885,19.469 v1(19.177,19.177) R5.2
  Bottom Layer w0.152: P1.R2 16.24,18.815 16.24,19.304 16.621,19.685 17.653,19.685 18.034,19.304 18.034,16.968 18.619,16.383 21.082,16.383 21.717,15.748 21.717,13.843 21.488,13.614 21.209,13.614 21.016,13.807 U1.6 ; v1(19.177,19.177) R10.2
MDI_T_P: P1.R1 R4.2 R9.2 U1.1 | length 21.5
  Top Layer w0.152: P1.R1 16.093,19.445 16.422,19.774 18.885,19.774 v1(19.177,20.066) R4.2
  Bottom Layer w0.152: P1.R1 15.95,19.445 16.495,19.99 17.779,19.99 18.339,19.43 18.339,17.094 18.745,16.688 21.208,16.688 22.022,15.874 22.022,13.717 21.933,13.627 21.615,13.31 21.209,13.31 21.016,13.117 U1.1 ; v1(19.177,20.066) R9.2
NetC4_2: C4.2 R9.1 R10.1 | length 1.8
  Bottom Layer w0.381: C4.2 R10.1 R9.1
NetC5_2: C5.2 R11.1 R12.1 | length 1.8
  Bottom Layer w0.381: R11.1 R12.1 C5.2
NetC6_2: C6.2 P1.R3 | length 5.4
  Top Layer w0.381: P1.R3 14.354,16.891 C6.2
NetC11_2: C11.2 U5.2 | length 1.8
  Top Layer w0.152: C11.2 v1(36.957,13.208)
  Bottom Layer w0.152: U5.2 36.931,13.182 v1(36.957,13.208)
NetC12_2: C12.2 U5.6 | length 2.4
  Top Layer w0.152: C12.2 v1(35.052,13.208)
  Bottom Layer w0.152: U5.6 34.331,12.995 34.544,13.208 v1(35.052,13.208)
NetC13_1: C13.1 U5.1 | length 1.6
  Bottom Layer w0.152: U5.1 37.581,10.544 C13.1
NetC13_2: C13.2 U5.3 | length 1.7
  Bottom Layer w0.152: U5.3 36.281,10.844 C13.2
NetC14_1: C14.1 U5.4 | length 1.5
  Bottom Layer w0.152: U5.4 35.631,10.462 C14.1
NetC14_2: C14.2 U5.5 | length 1.6
  Bottom Layer w0.152: C14.2 34.981,10.716 U5.5
NetD1_2: D1.2 R36.1 | length 1.5
  Top Layer w0.152: v1(33.528,26.505) D1.2
  Bottom Layer w0.152: v1(33.528,26.505) 33.828,26.805 R36.1
NetD2_2: D2.2 R37.1 | length 7.7
  Top Layer w0.152: R37.1 29.37,26.06 30.328,26.06 30.632,25.756 35.357,25.756 35.56,25.959 D2.2
NetD3_2: D3.2 R38.1 | length 7.7
  Bottom Layer w0.152: R38.1 29.37,26.06 30.328,26.06 30.632,25.756 35.357,25.756 35.56,25.959 D3.2
NetD4_2: D4.2 R39.1 | length 8
  Top Layer w0.152: R39.1 29.786,25.451 36.576,25.451 36.83,25.705 D4.2
NetD5_2: D5.2 R40.1 | length 8
  Bottom Layer w0.152: R40.1 29.786,25.451 36.576,25.451 36.83,25.705 D5.2
NetJ1_4: J1.4 R33.1 U3.3 | length 44.7
  Top Layer w0.152: v1(9.398,1.59) U3.3 10.355,1.227 10.668,0.914 35.052,0.914 35.357,1.219 35.357,3.048 35.052,3.353 33.528,3.353 33.223,3.658 33.223,7.925 34.747,9.449 38.185,9.449 J1.4
  Bottom Layer w0.152: v1(9.398,1.59) 10.869,1.59 R33.1
NetJ5_1: J5.1 U3.1 | length 10.2
  Top Layer w0.152: v1(9.398,3.49) U3.1
  Bottom Layer w0.152: v1(9.398,3.49) 10.099,4.191 14.224,4.191 14.859,4.191 17.05,2 J5.1
NetP1_L1: P1.L1 R14.2 | length 22.2
  Bottom Layer w0.152: P1.L1 4.62,12.113 13.462,20.955 R14.2
NetP1_L3: P1.L3 R15.2 | length 17.4
  Bottom Layer w0.152: P1.L3 5.498,17.907 8.89,17.907 13.589,22.606 R15.2
NetR13_2: R13.2 U2.12 | length 2.6
  Top Layer w0.152: U2.12 33.125,15.751 33.528,16.154 33.528,16.612 33.807,16.891 R13.2
NetR16_2: R16.2 U2.32 | length 1.6
  Top Layer w0.152: R16.2 24.884,19.693 25.067,19.51 U2.32
NetR25_1: R25.1 U7.2 U7.3 | length 8.7
  Bottom Layer w0.152: R25.1 31.394,10.516 32.918,8.992 32.918,7.112 ; U7.2 32.664,5.842 32.918,6.096 32.918,7.112 ; U7.3 32.918,7.112
NetR32_2: R32.2 U3.4 | length 2.9
  Top Layer w0.152: U3.4@12.645,1.45 U3.4 13.655,1.59 14.478,2.413 R32.2
REGIN: C23.1 C24.2 L2.1 U2.13 | length 7.4
  Top Layer w0.152: v1(28.702,16.129) 28.702,16.151 U2.13
  Bottom Layer w0.381: C23.1 27.978,17.612 L2.1 v1(28.702,16.129) 28.702,14.994 C24.2
REGOUT: C25.2 C26.1 L2.2 U2.36 | length 5.5
  Top Layer w0.152: U2.36 25.632,16.151 v1(25.654,16.129)
  Bottom Layer w0.381: C26.1 v1(25.654,16.129) ; C25.2 25.654,14.994 v1(25.654,16.129) ; L2.2 v1(25.654,16.129)
"RS232/485 SELECT PIN": R3.1 R6.2 U2.11 | length 3
  Top Layer w0.152: U2.11 33.182,15.351 33.833,16.002 R6.2 R3.1
RSTN: J2.5 J3.4 J5.2 U2.26 | length 45
  Top Layer w0.152: v1(26.162,13.716) 26.162,15.24 26.569,15.647 26.569,16.79 27.467,17.688 U2.26 27.467,20.082 26.518,21.031 26.518,23.089 27.813,24.384 27.813,26.543 29.21,27.94 J2.5
  Bottom Layer w0.152: J5.2 19.939,2.921 20.32,3.302 22.606,3.302 22.987,3.683 22.987,10.49 26.162,13.665 v1(26.162,13.716) ; J3.4 25.4,25.654 24.765,26.289 23.495,26.289 22.86,26.924 22.86,28.702 23.368,29.21 28.829,29.21 29.21,28.829 J2.5
RXD_RO: R23.2 U2.44 U5.12 U6.1 | length 34.8
  Top Layer w0.152: U2.44 24.692,12.951 26.34,11.303 27.94,11.303 28.448,11.811 v1(29.21,11.811) ; v1(34.036,23.876) R23.2
  Bottom Layer w0.152: v1(29.21,11.811) 29.21,12.446 29.413,12.649 30.48,12.649 31.852,14.021 31.852,15.697 32.156,16.002 34.595,16.002 34.981,16.388 U5.12 34.981,23.566 34.671,23.876 v1(34.036,23.876) 34.036,24.79 33.68,25.146 30.632,25.146 30.328,24.841 30.328,23.47 29.87,23.012 29.87,20.879 30.175,20.574 U6.1
SCL1: R34.1 U2.57 U4.1 | length 16
  Top Layer w0.152: v1(21.59,6.858) 21.082,6.858 20.693,6.469 R34.1 21.59,5.334 22.657,4.267 26.67,4.267 27.28,4.877 27.28,8.23 28.267,9.217 U2.57
  Bottom Layer w0.152: U4.1 21.59,6.284 v1(21.59,6.858)
SDA1: R35.1 U2.58 U4.3 | length 14.3
  Top Layer w0.152: R35.1@20.759,4.384 R35.1 21.201,3.81 v1(21.59,3.81) 22.479,3.81 22.631,3.962 26.822,3.962 27.584,4.724 27.584,8.077 28.667,9.16 U2.58
  Bottom Layer w0.152: U4.3 21.59,4.384 v1(21.59,3.81)
STATUS_LED0: R37.2 R38.2 U2.47 | length 23
  Top Layer w0.152: v1(23.495,10.033) 23.114,10.033 22.86,10.287 22.86,11.557 23.054,11.751 U2.47 ; v1(28.829,24.003) R37.2
  Bottom Layer w0.152: v1(23.495,10.033) 23.495,10.541 26.06,13.106 26.67,13.106 27.737,14.173 29.718,14.173 30.328,14.783 30.328,16.307 29.261,17.374 29.261,23.165 28.829,23.597 v1(28.829,24.003) R38.2
STATUS_LED1: R39.2 R40.2 U2.48 | length 23.2
  Top Layer w0.152: v1(23.495,9.271) 24.003,9.779 24.003,11.351 U2.48 ; v1(29.718,24.003) R39.2
  Bottom Layer w0.152: v1(23.495,9.271) 24.079,9.855 24.079,10.668 26.213,12.802 26.822,12.802 27.889,13.868 29.87,13.868 30.632,14.63 30.632,16.459 29.566,17.526 29.566,23.165 29.718,23.317 v1(29.718,24.003) R40.2
SWCLK: J3.3 U2.30 | length 7.2
  Top Layer w0.152: J3.3 24.13,22.352 25.867,20.615 U2.30
SWDIO: J3.2 U2.31 | length 7.5
  Top Layer w0.152: J3.2 22.86,23.114 25.467,20.507 U2.31
TXD_DI: R22.2 U2.43 U5.10 U6.4 U7.4 | length 46.3
  Top Layer w0.152: U2.43 24.749,13.351 26.289,11.811 v1(27.686,11.811) ; v1(34.036,7.874) R22.2
  Bottom Layer w0.152: U7.4 31.49,8.896 31.242,9.144 28.042,9.144 ; U6.4 32.385,24.384 32.639,24.13 32.639,20.828 32.829,20.637 33.465,20.637 33.681,20.421 U5.10 33.681,16.917 33.376,16.612 31.852,16.612 31.242,16.002 31.242,14.326 30.175,13.259 28.499,13.259 28.194,12.954 28.194,12.319 v1(27.686,11.811) 27.686,9.5 28.042,9.144 ; v1(34.036,7.874) 33.477,7.874 33.223,7.62 33.223,3.962 32.918,3.658 28.042,3.658 27.686,4.013 27.686,8.788 28.042,9.144
U_CTS0: R24.2 U2.41 U5.9 | length 31.4
  Top Layer w0.152: U2.41 24.863,14.151 26.187,12.827 v1(27.686,12.827) ; v1(34.036,5.08) R24.2
  Bottom Layer w0.152: U5.9 33.031,17.181 32.766,16.916 31.699,16.916 30.937,16.154 30.937,14.478 30.023,13.564 28.042,13.564 27.686,13.208 v1(27.686,12.827) 27.178,12.319 27.178,4.064 27.889,3.353 33.071,3.353 33.528,3.81 33.528,4.572 v1(34.036,5.08)
U_RXD2: J2.3 U2.4 | length 21.3
  Top Layer w0.152: v1(29.464,15.621) 29.693,15.392 30.505,15.392 30.988,14.909 30.988,12.757 31.242,12.503 31.443,12.503 31.491,12.551 U2.4
  Bottom Layer w0.152: J2.3 25.061,28 25.248,27.813 25.248,26.772 25.692,26.327 25.782,26.238 27.102,26.238 27.432,25.908 27.432,24.079 28.651,22.86 28.651,17.069 29.464,16.256 v1(29.464,15.621)
U_TXD2: J2.4 U2.3 | length 22.4
  Top Layer w0.152: v1(29.464,14.859) 29.693,15.088 30.378,15.088 30.683,14.783 30.683,12.631 31.116,12.199 31.443,12.199 31.491,12.151 U2.3
  Bottom Layer w0.152: J2.4 25.739,28 25.552,27.813 25.552,26.899 25.908,26.543 27.228,26.543 27.737,26.034 27.737,24.232 28.956,23.012 28.956,17.221 30.023,16.154 30.023,15.418 v1(29.464,14.859)
VDD_3.3A: C21.2 C22.1 L1.2 U2.40 | length 4.8
  Top Layer w0.152: v1(22.53,14.089) 22.992,14.551 U2.40
  Top Layer w0.508: L1.2 16.421,25.527 v2(17.481,25.527)
  Bottom Layer w0.381: v1(22.53,14.089) C21.2
  Bottom Layer w0.508: C22.1 v2(17.481,25.527)
VDD_3.3V: C1.2 C10.2 C15.2 C16.2 C17.1 C18.2 C19.2 C20.2 C27.2 C28.2 D1.1 D2.1 D3.1 D4.1 D5.1 J1.1 J1.2 J2.1 J3.1 L1.1 R3.2 R14.1 R15.1 R17.1 R18.2 R19.2 R20.2 R25.2 R26.1 R28.1 R33.2 R34.2 R35.2 R42.1 U1.5 U2.10 U2.18 U2.61 U3.5 U4.4 U5.16 U6.8 U7.8 | length 37.4
  Top Layer w0.152: v1(29.667,11.303) 29.867,11.103 U2.61 ; U2.18 v1(30.667,19.753) ; U2.10 33.36,14.951 33.68,14.63 34.688,14.63 R3.2
  Top Layer w0.381: U3.5 v1(13.462,3.49) ; v1(15.367,2.032) 15.371,2.036 R42.1 ; v1(16.756,4.834) 17.272,4.318 R35.2 R34.2 ; C1.2 v1(20.066,15.875) ; v1(34.036,6.985) R28.1 ; v1(34.036,22.987) R26.1 ; R3.2 v1(35.687,15.113) ; C16.2 v1(36.068,4.191) ; C15.2 v1(36.068,20.193) ; C10.2 R17.1 v1(37.795,19.304)
  Top Layer w0.508: D1.1 v1(34.925,28.105) D2.1 ; D4.1 v1(37.465,28.105)
  Bottom Layer w0.254: U5.16 37.581,19.061
  Bottom Layer w0.381: R33.2 C27.2 11.93,3.167 12.253,3.49 v1(13.462,3.49) ; v1(16.756,4.834) C28.2 17.722,4.384 U4.4 ; U1.5 v1(20.066,15.875) ; R14.1 v1(21.209,20.955) ; R15.1 21.209,22.606 21.59,22.987 J3.1 ; v1(24.249,20.82) R20.2 R18.2 ; R25.2@29.667,10.524 v1(29.667,11.303) ; R19.2 v1@30.67,19.75 ; v1(36.068,4.191) 36.322,4.191 36.703,4.572 U7.8 ; v1(36.068,20.193) 36.322,20.193 36.703,20.574 U6.8 U6.8@36.957,20.441
  Bottom Layer w0.508: v1(34.925,28.105) D3.1 ; D5.1 v1(37.465,28.105)
WDI: R32.1 R42.2 U2.29 | length 22.6
  Top Layer w0.152: R32.1 R42.2 15.371,4.933 15.772,5.334 18.034,5.334 18.669,5.969 19.685,5.969 21.082,7.366 21.971,7.366 22.225,7.62 v1(22.225,8.001) ; v1(25.654,14.224) 25.654,15.24 26.267,15.853 U2.29
  Bottom Layer w0.152: v1(22.225,8.001) 22.225,10.185 25.654,13.614 v1(25.654,14.224)
X1: C9.2 U2.50 Y2.3 | length 7.3
  Top Layer w0.152: v1(23.715,5.207) Y2.3 24.523,6.108 24.765,6.35 24.765,8.382 25.467,9.084 U2.50
  Bottom Layer w0.152: v1(23.715,5.207) C9.2
X2: C8.2 U2.51 Y2.1 | length 3.7
  Top Layer w0.152: Y2.1 v1(25.815,8.509) 25.815,8.924 25.867,8.976 U2.51
  Bottom Layer w0.152: C8.2 v1(25.815,8.509)
XIN: C3.2 R1.2 U2.63 Y1.3 | length 6.6
  Top Layer w0.152: Y1.3 v1(28.587,8.255) 29.095,8.763 30.353,8.763 30.667,9.077 U2.63
  Bottom Layer w0.152: v1(28.587,8.255) 28.837,8.005 C3.2 R1.2
XOUT: C2.2 R1.1 U2.64 Y1.1 | length 8.9
  Top Layer w0.152: v1(30.087,4.191) Y1.1 30.827,5.173 31.067,5.413 U2.64
  Bottom Layer w0.152: R1.1 C2.2 29.837,4.441 v1(30.087,4.191)
pads on no net: P1. P1.R4 P1.R5 P1.R6 U2.8 U2.19 U2.20 U2.21 U2.22 U2.27 U2.45 U2.46 U2.53 U2.54 U2.55 U2.56 U2.59 U2.60 U7.1
copper on no net:
  other v2: 41.5,1.417 40.027,2.027 42.973,2.027 39.417,3.5 43.583,3.5 40.027,4.973 42.973,4.973 41.5,5.583 41.5,24.417 40.027,25.027 42.973,25.027 39.417,26.5 43.583,26.5 40.027,27.973 42.973,27.973 41.5,28.583

## Polygon pours and split planes (outlines as drawn)
VDD_3.3V on Top Layer "Top Layer-net" (solid, remove dead copper, pour order 2): 14.859,26.543 19.812,26.543 20.066,26.797 20.066,29.21 19.812,29.464 19.05,29.464 15.113,29.464 14.859,29.21 14.859,26.543
CH_GND on Top Layer "Top Layer-net" (solid, remove dead copper, pour order 12): 0.762,29.591 0.381,29.21 0.381,27.432 0.381,0.762 0.762,0.381 2.413,0.381 6.35,0.381 6.604,0.635 6.604,1.143 6.604,5.588 6.985,5.969 8.128,5.969 11.938,5.969 12.192,6.223 12.192,23.749 11.938,24.003 9.017,24.003 8.636,24.384 8.636,29.337 8.382,29.591
GND on Top Layer "Top Layer-gnd" (solid, remove dead copper, pour order 16): 11.176,29.591 10.922,29.337 10.922,28.448 10.922,25.527 11.176,25.273 11.811,25.273 12.827,25.273 13.462,24.638 14.605,23.495 18.288,23.495 19.177,23.495 19.431,23.241 19.431,22.987 19.431,6.731 19.177,6.477 18.415,6.477 14.605,6.477 12.954,4.826 8.763,4.826 8.509,4.572 8.509,4.318 8.509,0.635 8.763,0.381 9.652,0.381 37.211,0.381 37.465,0.635 37.465,0.889 37.465,5.461 39.243,7.239 39.624,7.62 42.799,7.62 44.323,7.62 44.577,7.874 44.577,8.509 44.577,22.098 44.323,22.352 44.069,22.352 39.624,22.352 37.465,24.511 37.465,28.575 37.465,29.337 37.211,29.591
GND on Bottom Layer "Top Layer-gnd" (solid, remove dead copper, pour order 22): 11.049,29.464 10.922,29.337 10.922,28.448 10.922,25.527 11.176,25.273 11.811,25.273 12.827,25.273 13.462,24.638 14.605,23.495 18.288,23.495 19.177,23.495 19.431,23.241 19.431,22.987 19.431,6.731 19.177,6.477 18.415,6.477 14.605,6.477 12.827,4.699 8.636,4.699 8.509,4.572 8.509,4.318 8.509,0.635 8.763,0.381 9.652,0.381 37.211,0.381 37.465,0.635 37.465,0.889 37.465,5.461 39.243,7.239 39.624,7.62 42.799,7.62 44.323,7.62 44.577,7.874 44.577,8.509 44.577,22.098 44.323,22.352 44.069,22.352 39.624,22.352 37.465,24.511 37.465,28.575 37.465,29.337 37.338,29.464
CH_GND on Bottom Layer "Top Layer-net" (solid, remove dead copper, pour order 20): 0.762,29.591 0.381,29.21 0.381,27.432 0.381,0.762 0.762,0.381 2.413,0.381 6.35,0.381 6.604,0.635 6.604,1.143 6.604,5.588 6.985,5.969 8.128,5.969 11.938,5.969 12.192,6.223 12.192,23.749 11.938,24.003 9.017,24.003 8.636,24.384 8.636,29.337 8.382,29.591
VDD_3.3V on Bottom Layer "Top Layer-net" (solid, remove dead copper, pour order 6): 16.256,28.829 15.113,28.829 14.859,28.575 14.859,27.559 14.859,27.305 15.113,27.051 16.002,27.051 19.812,27.051 20.066,27.305 20.066,28.575 19.812,28.829
CH_GND on Internal Plane 1 (split plane): 44.304,29.483 44.365,29.458 44.417,29.417 44.458,29.365 44.483,29.304 44.49,29.247 44.49,29.238 44.49,23.687 40.212,23.687 38.673,25.226 38.673,29.49 44.238,29.49 44.247,29.49
CH_GND on Internal Plane 1 (split plane): 44.49,0.762 44.49,0.753 44.483,0.696 44.458,0.635 44.417,0.583 44.365,0.542 44.304,0.517 44.247,0.51 44.238,0.51 38.673,0.51 38.673,4.746 40.339,6.412 44.49,6.412
GND on Internal Plane 1 (split plane): 38.289,25.146 38.295,25.096 38.307,25.069 38.315,25.05 38.345,25.01 39.996,23.359 40.036,23.329 40.082,23.309 40.132,23.303 44.49,23.303 44.49,6.796 40.259,6.796 40.209,6.79 40.163,6.77 40.123,6.74 38.345,4.962 38.315,4.922 38.307,4.903 38.295,4.876 38.289,4.826 38.289,0.51 7.05,0.51 7.05,5.523 12.446,5.523 12.496,5.529 12.542,5.549 12.582,5.579 12.612,5.619 12.632,5.665 12.638,5.715 12.638,6.844 18.791,6.844 18.791,23.1 12.638,23.1 12.638,24.257 12.632,24.307 12.612,24.353 12.582,24.393 12.542,24.423 12.496,24.443 12.446,24.449 9.082,24.449 9.082,29.49 38.289,29.49
CH_GND on Internal Plane 1 (split plane): 0.762,29.49 8.698,29.49 8.698,24.257 8.704,24.207 8.724,24.161 8.754,24.121 8.794,24.091 8.84,24.071 8.89,24.065 12.254,24.065 12.254,5.907 6.858,5.907 6.808,5.901 6.762,5.881 6.722,5.851 6.692,5.811 6.672,5.765 6.666,5.715 6.666,0.51 0.762,0.51 0.753,0.51 0.696,0.517 0.635,0.542 0.583,0.583 0.542,0.635 0.517,0.696 0.51,0.753 0.51,0.762 0.51,29.238 0.51,29.247 0.517,29.304 0.542,29.365 0.583,29.417 0.635,29.458 0.696,29.483 0.753,29.49
CH_GND on Internal Plane 2 (split plane): 44.304,29.483 44.365,29.458 44.417,29.417 44.458,29.365 44.483,29.304 44.49,29.247 44.49,29.238 44.49,23.687 40.212,23.687 38.673,25.226 38.673,29.49 44.238,29.49 44.247,29.49
VDD_3.3A on Internal Plane 2 (split plane): 18.096,26.543 18.102,26.493 18.122,26.447 18.152,26.407 18.192,26.377 18.238,26.357 18.288,26.351 20.509,26.351 20.509,17.083 19.685,17.083 19.635,17.077 19.589,17.057 19.549,17.027 19.519,16.987 19.499,16.941 19.493,16.891 19.493,14.732 19.499,14.682 19.519,14.636 19.549,14.596 19.589,14.566 19.635,14.546 19.685,14.54 23.176,14.54 23.176,12.638 18.791,12.638 18.791,23.1 12.638,23.1 12.638,24.257 12.632,24.307 12.612,24.353 12.582,24.393 12.542,24.423 12.496,24.443 12.446,24.449 9.082,24.449 9.082,29.49 18.096,29.49
CH_GND on Internal Plane 2 (split plane): 44.49,0.762 44.49,0.753 44.483,0.696 44.458,0.635 44.417,0.583 44.365,0.542 44.304,0.517 44.247,0.51 44.238,0.51 38.673,0.51 38.673,4.746 40.339,6.412 44.49,6.412
VDD_3.3V on Internal Plane 2 (split plane): 38.289,25.146 38.295,25.096 38.307,25.069 38.315,25.05 38.345,25.01 39.996,23.359 40.036,23.329 40.082,23.309 40.132,23.303 44.49,23.303 44.49,6.796 40.259,6.796 40.209,6.79 40.163,6.77 40.123,6.74 38.345,4.962 38.315,4.922 38.307,4.903 38.295,4.876 38.289,4.826 38.289,0.51 7.05,0.51 7.05,5.523 12.446,5.523 12.496,5.529 12.542,5.549 12.582,5.579 12.612,5.619 12.632,5.665 12.638,5.715 12.638,6.844 18.791,6.844 18.791,12.254 23.368,12.254 23.418,12.26 23.464,12.28 23.504,12.31 23.534,12.35 23.554,12.396 23.56,12.446 23.56,14.732 23.554,14.782 23.534,14.828 23.504,14.868 23.464,14.898 23.418,14.918 23.368,14.924 19.877,14.924 19.877,16.699 20.701,16.699 20.751,16.705 20.797,16.725 20.837,16.755 20.867,16.795 20.887,16.841 20.893,16.891 20.893,26.543 20.887,26.593 20.867,26.639 20.837,26.679 20.797,26.709 20.751,26.729 20.701,26.735 18.48,26.735 18.48,29.49 38.289,29.49
CH_GND on Internal Plane 2 (split plane): 0.762,29.49 8.698,29.49 8.698,24.257 8.704,24.207 8.724,24.161 8.754,24.121 8.794,24.091 8.84,24.071 8.89,24.065 12.254,24.065 12.254,5.907 6.858,5.907 6.808,5.901 6.762,5.881 6.722,5.851 6.692,5.811 6.672,5.765 6.666,5.715 6.666,0.51 0.762,0.51 0.753,0.51 0.696,0.517 0.635,0.542 0.583,0.583 0.542,0.635 0.517,0.696 0.51,0.753 0.51,0.762 0.51,29.238 0.51,29.247 0.517,29.304 0.542,29.365 0.583,29.417 0.635,29.458 0.696,29.483 0.753,29.49

## Keep-outs
Keep-Out Layer:
  the board outline again, w0.127
  text ".Layer_Name" at 9.398,31.75 h1.52

## Other copper
Top Layer:
  text ".Layer_Name" at 9.398,31.75 h1.52
Bottom Layer:
  text ".Layer_Name" at 9.398,31.75 h1.52
Internal Plane 1 (plane layer: these items are gaps in the copper):
  rectangle: 12.441,6.844 18.791,23.1
  lines w0.381: 6.858,0 6.858,5.715 12.446,5.715 12.446,24.257 8.89,24.257 8.89,30 ; 38.481,0 38.481,4.826 40.259,6.604 45,6.604 ; 38.481,30 38.481,25.146 40.132,23.495 45,23.495
  text "GND" at 9.398,31.782 h1.52
Internal Plane 2 (plane layer: these items are gaps in the copper):
  rectangle: 12.441,6.844 18.791,23.1
  lines w0.381: 6.858,0 6.858,5.715 12.446,5.715 12.446,24.257 8.89,24.257 8.89,30 38.481,30 38.481,25.146 40.132,23.495 45,23.495 ; 16.88,13.095 16.88,12.446 23.368,12.446 23.368,14.732 19.685,14.732 19.685,16.891 20.701,16.891 20.701,26.543 18.288,26.543 18.288,30 ; 38.481,0 38.481,4.826 40.259,6.604 45,6.604
  text "POWER" at 9.398,31.782 h1.52

## Silkscreen, mask and mechanical layers (free items; w line width, h text height)
Top Overlay:
  text ".Layer_Name" at 9.398,31.782 h1.52
  text "WIZ750SR Ver1.0" at 6.604,5.334 h1.52
Bottom Overlay:
  lines w0.203: 24.003,2 24.003,3.238 26.67,3.238 ; 28.829,3.238 31.623,3.238 31.623,2
  text ".Layer_Name" at 9.398,31.75 h1.52
  text "VDD" at 19.812,28.956 h0.64
  text "BOOT" at 22.606,28.956 h0.64
  text "RX" at 24.638,28.956 h0.64
  text "TX" at 27.178,28.956 h0.64
  text "nRST" at 30.226,28.956 h0.64
  text "GND" at 32.512,28.956 h0.64
  text "JTAG" at 25.253,25.961 h0.64
  text "GND" at 42.037,19.812 h0.64
  text "485_SEL" at 41.783,17.272 h0.64
  text "CTS" at 43.688,17.272 h0.64
  text "DSR" at 40.64,14.732 h0.64
  text "TXD" at 43.688,14.732 h0.64
  text "WIZ750SR" at 8.636,13.843 h1.52
  text "Ver1.0" at 8.636,12.7 h1.52
  text "DTR" at 40.64,12.192 h0.64
  text "RTS" at 43.688,12.192 h0.64
  text "nRESET" at 41.402,9.652 h0.64
  text "RXD" at 43.688,9.652 h0.64
  text "VDD" at 42.037,6.985 h0.64
  text "GPIO" at 28.639,2.921 h0.64
  text "WDT" at 19.939,0.381 h0.64
  text "D" at 24.194,0.381 h0.64
  text "C" at 26.733,0.381 h0.64
  text "B" at 29.273,0.381 h0.64
  text "A" at 31.813,0.381 h0.64
  text "A_Boot" at 35.56,0.381 h0.64
  text "GND" at 37.529,0.381 h0.64
Top Paste:
  text ".Layer_Name" at 9.398,31.75 h1.52
Bottom Paste:
  text ".Layer_Name" at 9.398,31.75 h1.52
Top Solder:
  text ".Layer_Name" at 9.398,31.75 h1.52
Bottom Solder:
  text ".Layer_Name" at 9.398,31.75 h1.52
Drill Guide:
  text ".Layer_Name" at 9.398,31.75 h1.52
Mechanical 2:
  lines w0.127: 51.892,12.065 78.054,12.065 ; 51.892,14.859 78.054,14.859 ; 0,0.762 ccw(c0.762,0.762) 0.762,0 44.238,0 ccw(c44.238,0.762) 45,0.762 45,29.238 ccw(c44.238,29.238) 44.238,30 0.762,30 ccw(c0.762,29.238) 0,29.238 0,0.762 ; 50.546,0.711 ccw(c51.257,0.711) 51.257,0 78.435,0 ccw(c78.435,0.711) 79.146,0.711 79.146,19.939 ccw(c78.435,19.939) 78.435,20.65 51.257,20.65 ccw(c51.257,19.939) 50.546,19.939 50.546,0.711
  text "BOARD NAME : WIZ750SR" at 0,42.926 h1.52
  text "VERSION : V1.0" at 0,40.132 h1.52
  text "SIZE : 45mmX30mmX1.6T" at 0,37.338 h1.52
  text "GERBER DATE : 2016.04.04" at 0,34.544 h1.52
  text "LAYER :" at 0,31.75 h1.52
  text "Layer Stack Up Detail for:" at 52.019,18.542 h1.02
  text "WIZ750SR V1.0.PcbDoc" at 51.892,16.129 h1.27
  text "Layer Name : 4L  1.6T" at 52.019,12.954 h1.02
  text "Top Layer" at 51.892,9.271 h1.52
  text "GND" at 51.892,6.477 h1.52
  text "POWER" at 51.892,3.81 h1.52
  text "Bottom Layer" at 51.892,1.27 h1.52
  text "KS-TECH artwork" at 50.495,-4.191 h5.08
Drill Drawing:
  text ".Layer_Name" at 9.398,31.75 h1.52
  text ".Legend" at 50.546,22.098 h1.02

## Dimensions
0,0.762 to 45,0.762 on Mechanical 2
0.762,0 to 0.762,30 on Mechanical 2

## Text inside footprints (layer, text, board x,y; h text height)
P1: Top Overlay "7" at 13.959,10.809 h0.76 r270; Top Overlay "8" at 16.499,9.539 h0.76 r270; Top Overlay "2" at 16.499,19.826 h0.76 r270; Top Overlay "1" at 13.959,20.842 h0.76 r270; Top Overlay "L1" at 2.651,8.763 h0.76 r270; Top Overlay "L2" at 2.651,10.287 h0.76 r270; Top Overlay "L3" at 2.651,18.669 h0.76 r270; Top Overlay "L4" at 2.651,20.32 h0.76 r270